# Altium PCB humidity sensor.PcbDoc
Units mil, origin at the board's own origin, x right, y up, seen from the top; angles counter-clockwise.
Board outline 5085 x 3355 mil, 2 copper layers (Top Layer, Bottom Layer); 3 components, 3 nets, 42 pads, 0 vias.
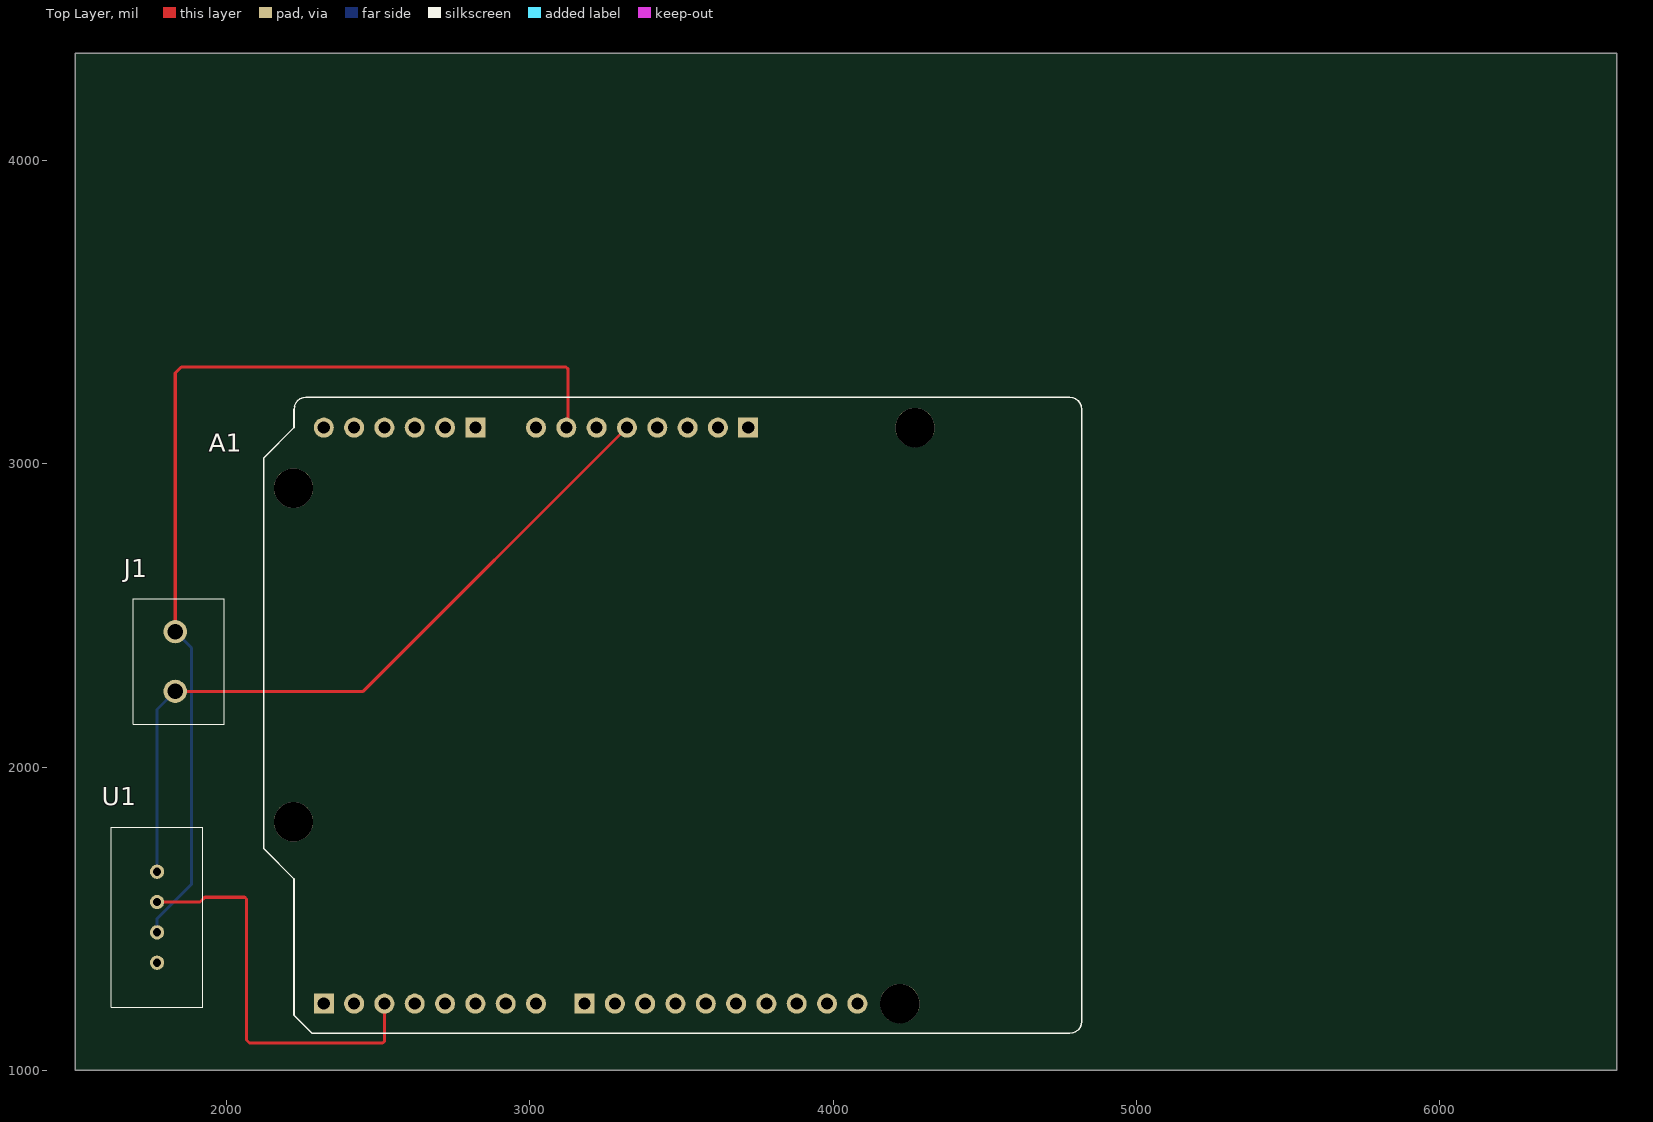
[diagram p0: Top Layer view]
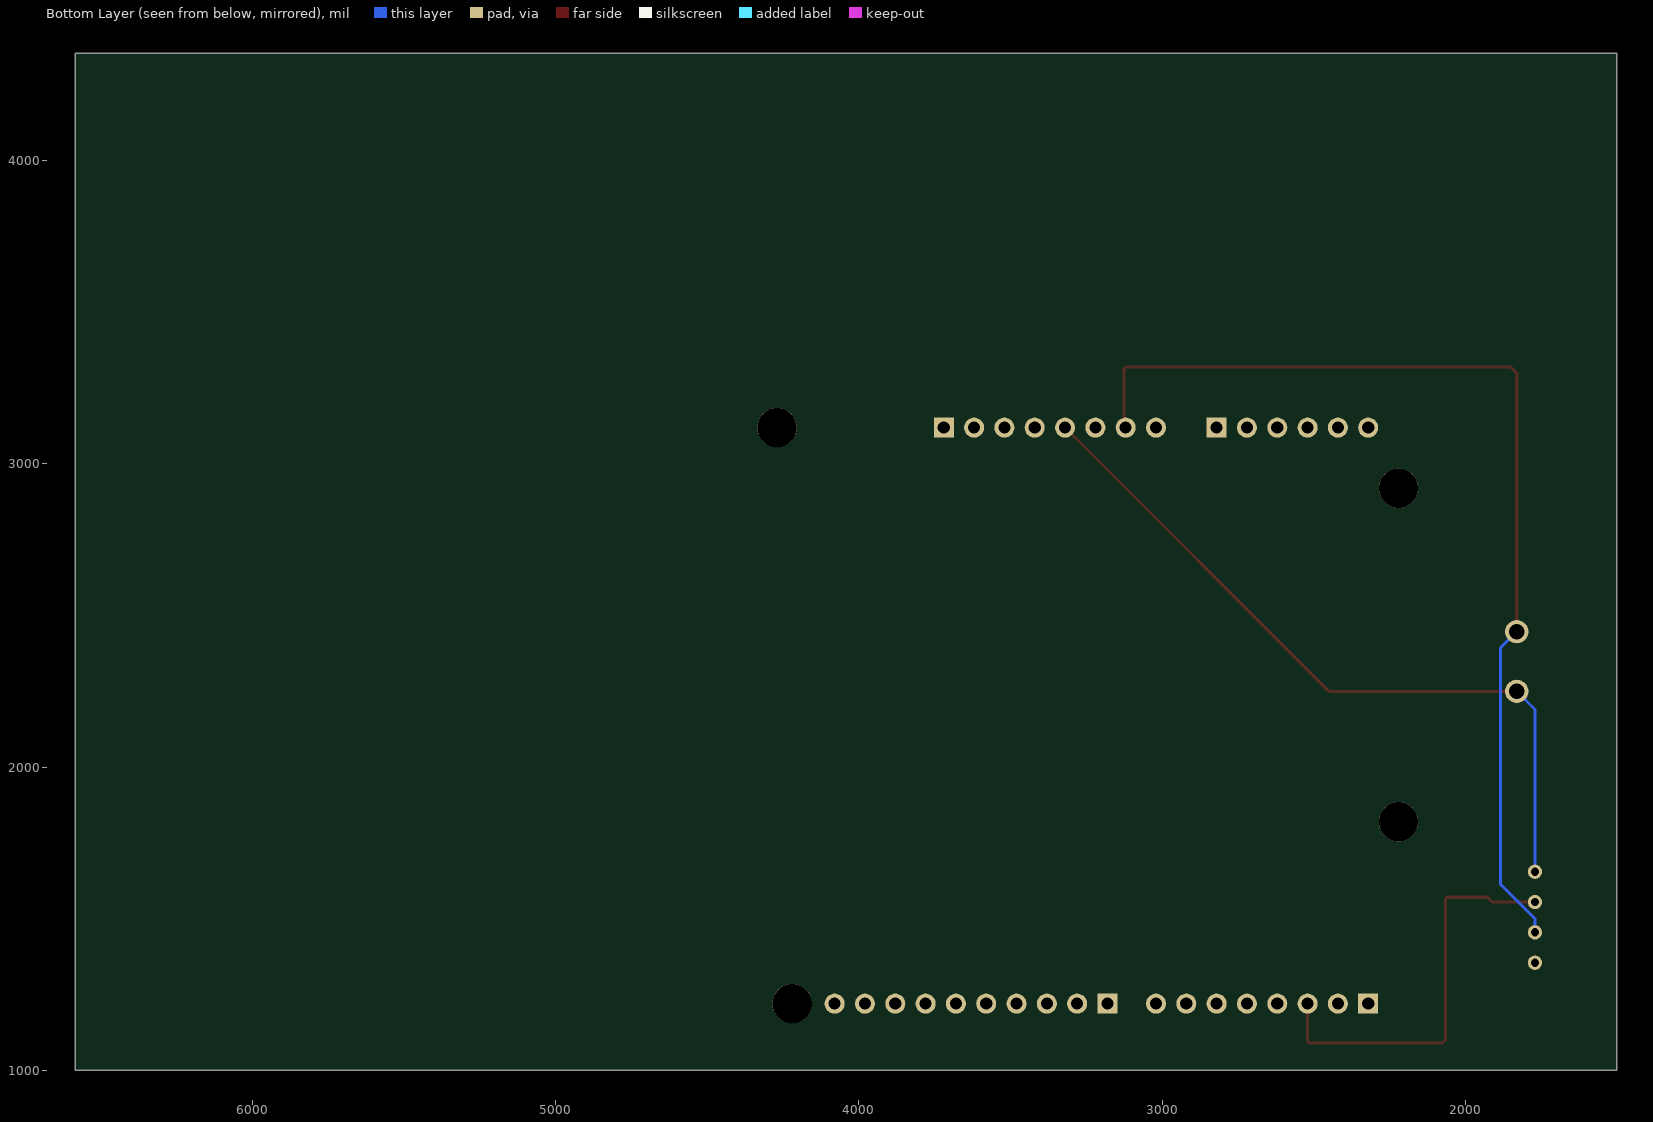
[diagram p1: Bottom Layer view, seen from below]
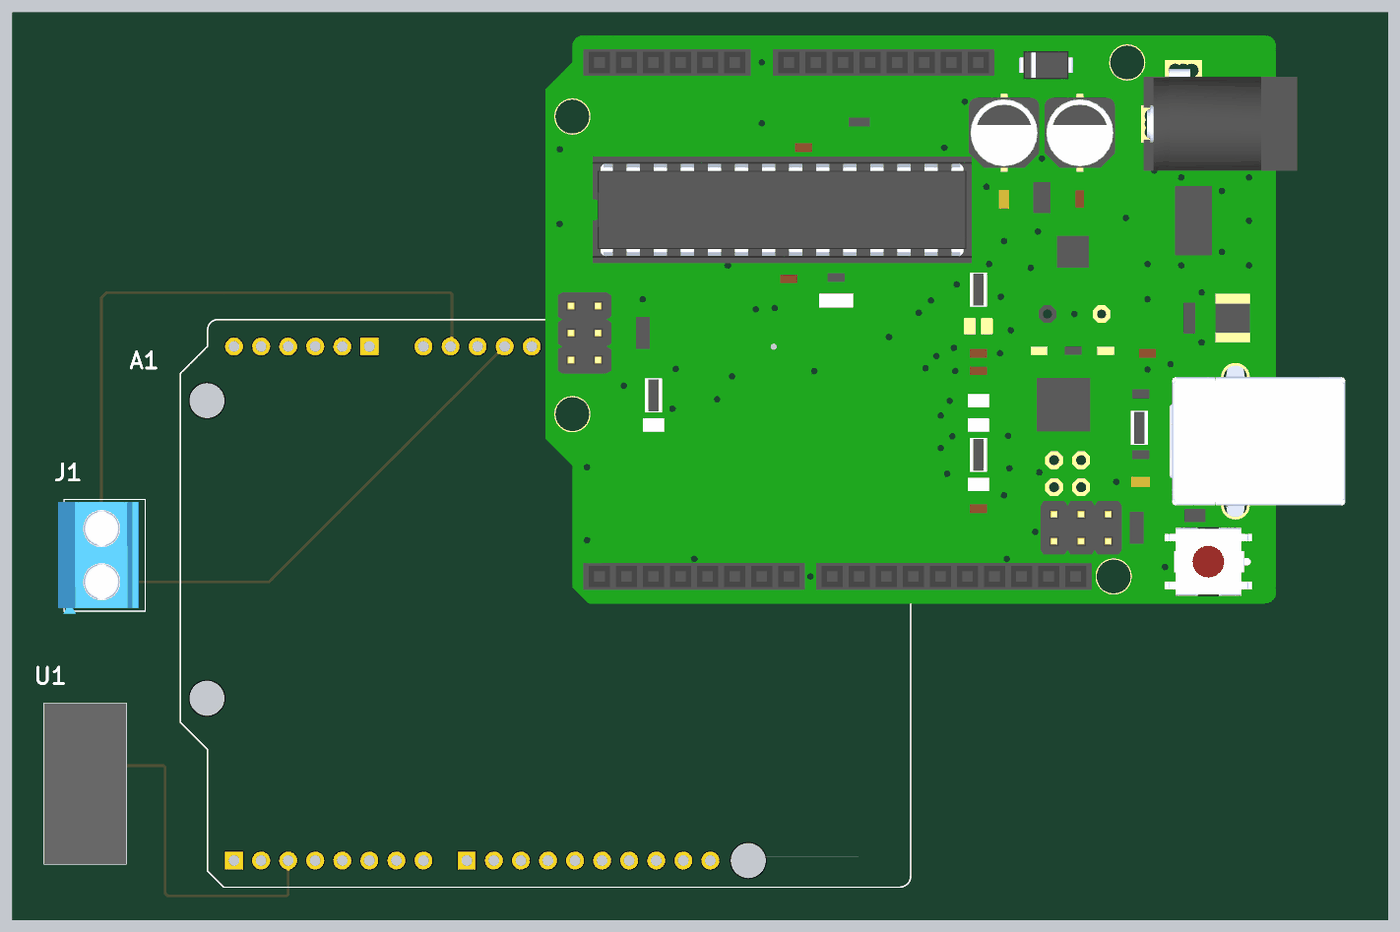
[diagram p2: 3D render of the assembled board from above, using the file's embedded part models]

## Layer stack, top to bottom
Top Solder: solder mask 0.4, Solder Resist, Dk 3.5
Top Layer: signal copper 1.4
Dielectric 1: dielectric 12.6, FR-4, Dk 4.8
Bottom Layer: signal copper 1.4
Bottom Solder: solder mask 0.4, Solder Resist, Dk 3.5

## Board outline
1500,1000 6585,1000 6585,4355 1500,4355

## Design rules (kind name [scope] priority, off if disabled: settings)
Clearance [All] p1: gap=10 ignorepadtopadclearanceinfootprint=FALSE
PolygonConnect [All] p1: connectstyle=Relief reliefconductorwidth=10 reliefentries=4 polygonreliefangle="90 Angle" airgapwidth=10
RoutingVias [All] p1: holewidth=28 width=50 viastyle="Through Hole" minholewidth=28 minwidth=50 maxholewidth=28 maxwidth=50
SolderMaskExpansion [All] p1: expansion=4 istentingtop=FALSE
Width [All] p1: maxlimit=10 minlimit=10 preferedwidth=10
30 further rules are at their usual default settings.

## Components (designator, comment, footprint, x,y, rotation, side; value= is the part's Value field where it differs from the comment)
A1 "A000066" ARDUINO_A000066 4820,3220 r180 top
J1 "Terminal Block" TB00250002BE 1830,2446.85 r270 top
U1 "Humidity Sensor DHT22" 314010001 1770,1655 r270 top

## Footprints (in the part's own frame and the unit in brackets; to place one, negate y for a bottom-side part, rotate by r counter-clockwise, add the part's x,y. Pads: shape width x height; smd on the part's side, far side on the other; paste and mask are expansions set on the pad)
314010001 [mm]
  round 1.2 hole 0.7: 1(0,0) 2(2.54,0) 3(5.08,0) 4(7.62,0)
  silkscreen extent -3.74,-3.85 11.36,3.85, body extent -3.74,-3.85 11.36,3.85, height 25.2
ARDUINO_A000066 [mil]
  round 66 hole 40: 3V3(1400,100) 5V(1500,100) A1(2100,100) A2(2200,100) A3(2300,100) A4(2400,100) A4(SDA)(840,2000) A5(2500,100) A5(SCL)(740,2000) AREF(940,2000) D1(2400,2000) D2(2300,2000) D3(2200,2000) D4(2100,2000) D5(2000,2000) D6(1900,2000) D7(1800,2000) D9(1540,2000) D10(1440,2000) D11(1340,2000) D12(1240,2000) D13(1140,2000) GND_1(1700,100) GND_2(1600,100) GND_3(1040,2000) IOREF(1200,100) RST(1300,100) VIN(1800,100)
  rect 66x66 hole 40: A0(2000,100) D0(2500,2000) D8(1640,2000) P1(1100,100)
  round 129.92 hole 129.92 unplated: ""(550,100) ""(600,2000) ""(2600,300) ""(2600,1400)
  silkscreen extent 0,0 2698,2098, body extent -1606,-1050 1350,1050, height 467
TB00250002BE [mm]
  round 1.95 hole 1.3: 1(0,0) 2(5,0)
  silkscreen extent -2.75,-3.5 7.75,4.1, body extent -2.51,-4.08 7.99,3.52, height 9.99

## Part data
A1: "Microcontroller board, Uno [Arduino] A000066 Microcontroller board, Uno 7640152110092 <a href=\"https://pricing.snapeda.com/parts/A000066/Arduino/view-part?ref=eda\">Check prices</a> <a href=\"https://pricing.snapeda.com/parts/A000066/Arduino/view-part?ref=eda\">Check prices</a>", Package=None, Availability=Unavailable, MF="{'manufacturer': u'Arduino'}", MP="ARDUINO UNO REV3", Price=None
J1: library part TB002-500-02BE, "Connector", Manufacturer_Name="CUI Devices", Mouser Part Number=490-TB002-500-02BE, Arrow Part Number=TB002-500-02BE, Arrow Price/Stock=https://www.arrow.com/en/products/tb002-500-02be/cui-devices?region=nac, Datasheet Link=https://eu.mouser.com/datasheet/2/670/tb002_500-1550579.pdf, Height=10.4mm, Manufacturer_Part_Number=TB002-500-02BE, Mouser Price/Stock=https://www.mouser.co.uk/ProductDetail/CUI-Devices/TB002-500-02BE?qs=vLWxofP3U2x9716kcgva%2Fw%3D%3D
U1: library part 314010001, Manufacturer_Name="Seeed Studio", Mouser Part Number=713-314010001, Datasheet Link=https://cdn-shop.adafruit.com/datasheets/Digital+humidity+and+temperature+sensor+AM2302.pdf, Height=25.1mm, Manufacturer_Part_Number=314010001, Mouser Price/Stock=https://www.mouser.co.uk/ProductDetail/Seeed-Studio/314010001?qs=XeJtXLiO41Rct75wpr%2Fpbg%3D%3D

## Nets (pads, with @x,y where several pads share a name; then routed paths per layer and width w, separated by ;. In a path a pad name is that pad's centre, name@x,y a point inside that pad or via, vN(x,y) a via of type N, cw(c..) or ccw(c..) an arc to the next point about the centre after c; other vN are vias at no path point)
NetA1_5V: A1.5V J1.2 U1.1 | length 2470.2
  Top Layer w10: J1.2 2450,2250 A1.5V
  Bottom Layer w10: U1.1 1770,2190 J1.2
NetA1_D2: A1.D2 U1.2 | length 1354.7
  Top Layer w10: U1.2 1911.68,1555 1927.54,1570.86 2059.14,1570.86 2065,1565 2065,1100 2075,1090 2514.14,1090 2520,1095.86 A1.D2
NetA1_GND_1: A1.GND_1 J1.1 U1.3 | length 3416
  Top Layer w10: J1.1 1830,3300 1850,3320 3119.14,3320 3125,3314.14 3125,3125 A1.GND_1
  Bottom Layer w10: U1.3 1770,1500.38 1883.39,1613.77 1883.39,2393.46 J1.1
pads on no net: A1. A1.3V3 A1.A0 A1.A1 A1.A2 A1.A3 A1.A4 A1.A4(SDA) A1.A5 A1.A5(SCL) A1.AREF A1.D0 A1.D1 A1.D3 A1.D4 A1.D5 A1.D6 A1.D7 A1.D8 A1.D9 A1.D10 A1.D11 A1.D12 A1.D13 A1.GND_2 A1.GND_3 A1.IOREF A1.P1 A1.RST A1.VIN U1.4